# Allegro board OSCILLATOR2.brd
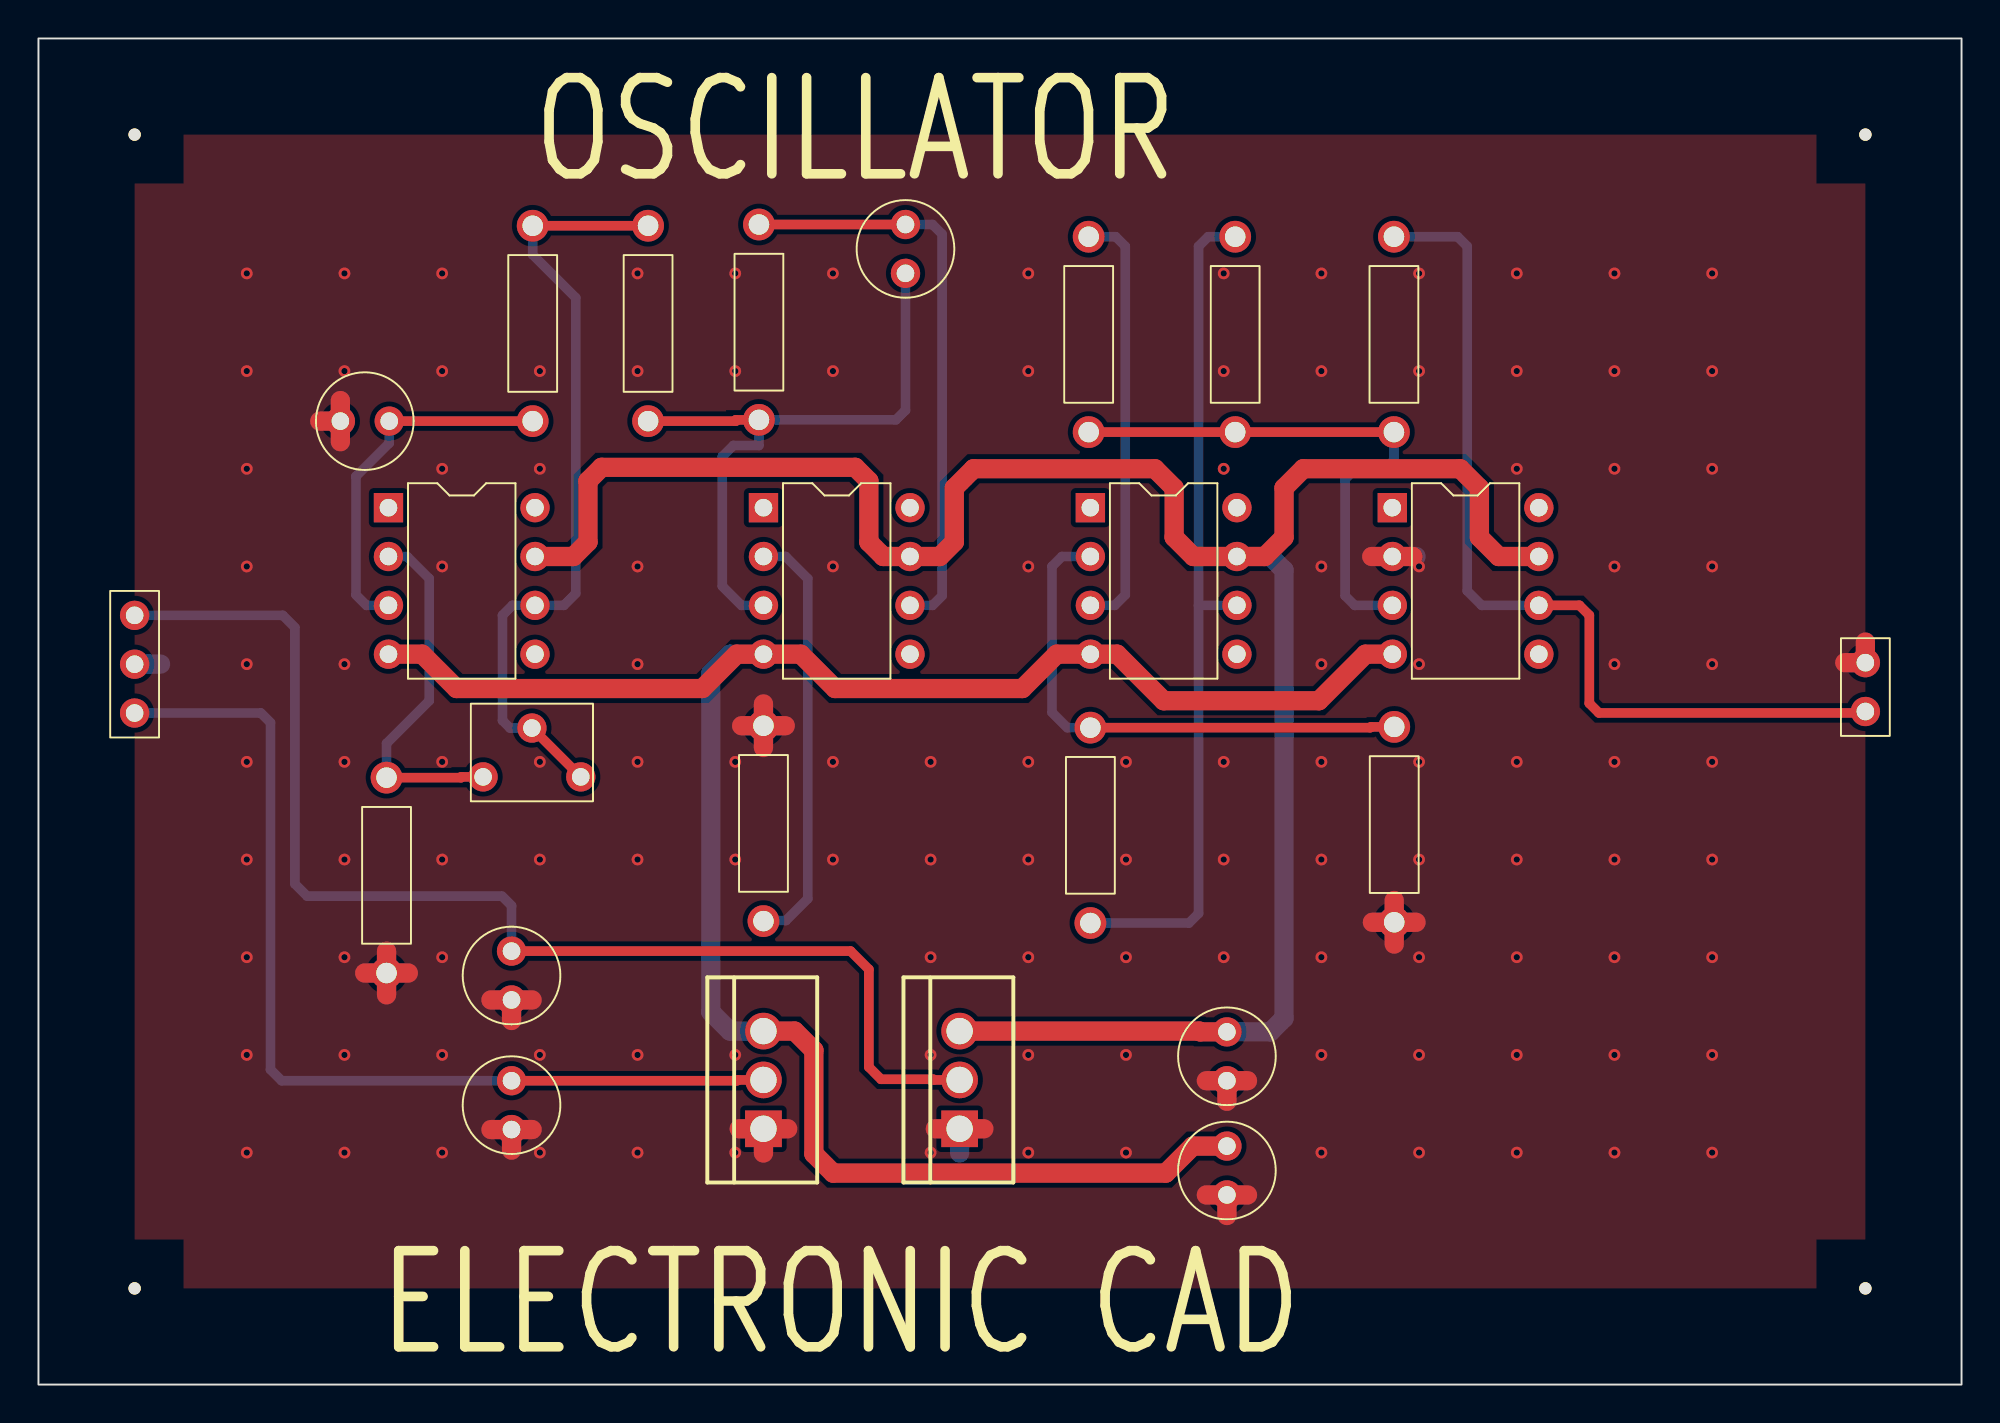
[diagram p0: board, top side]
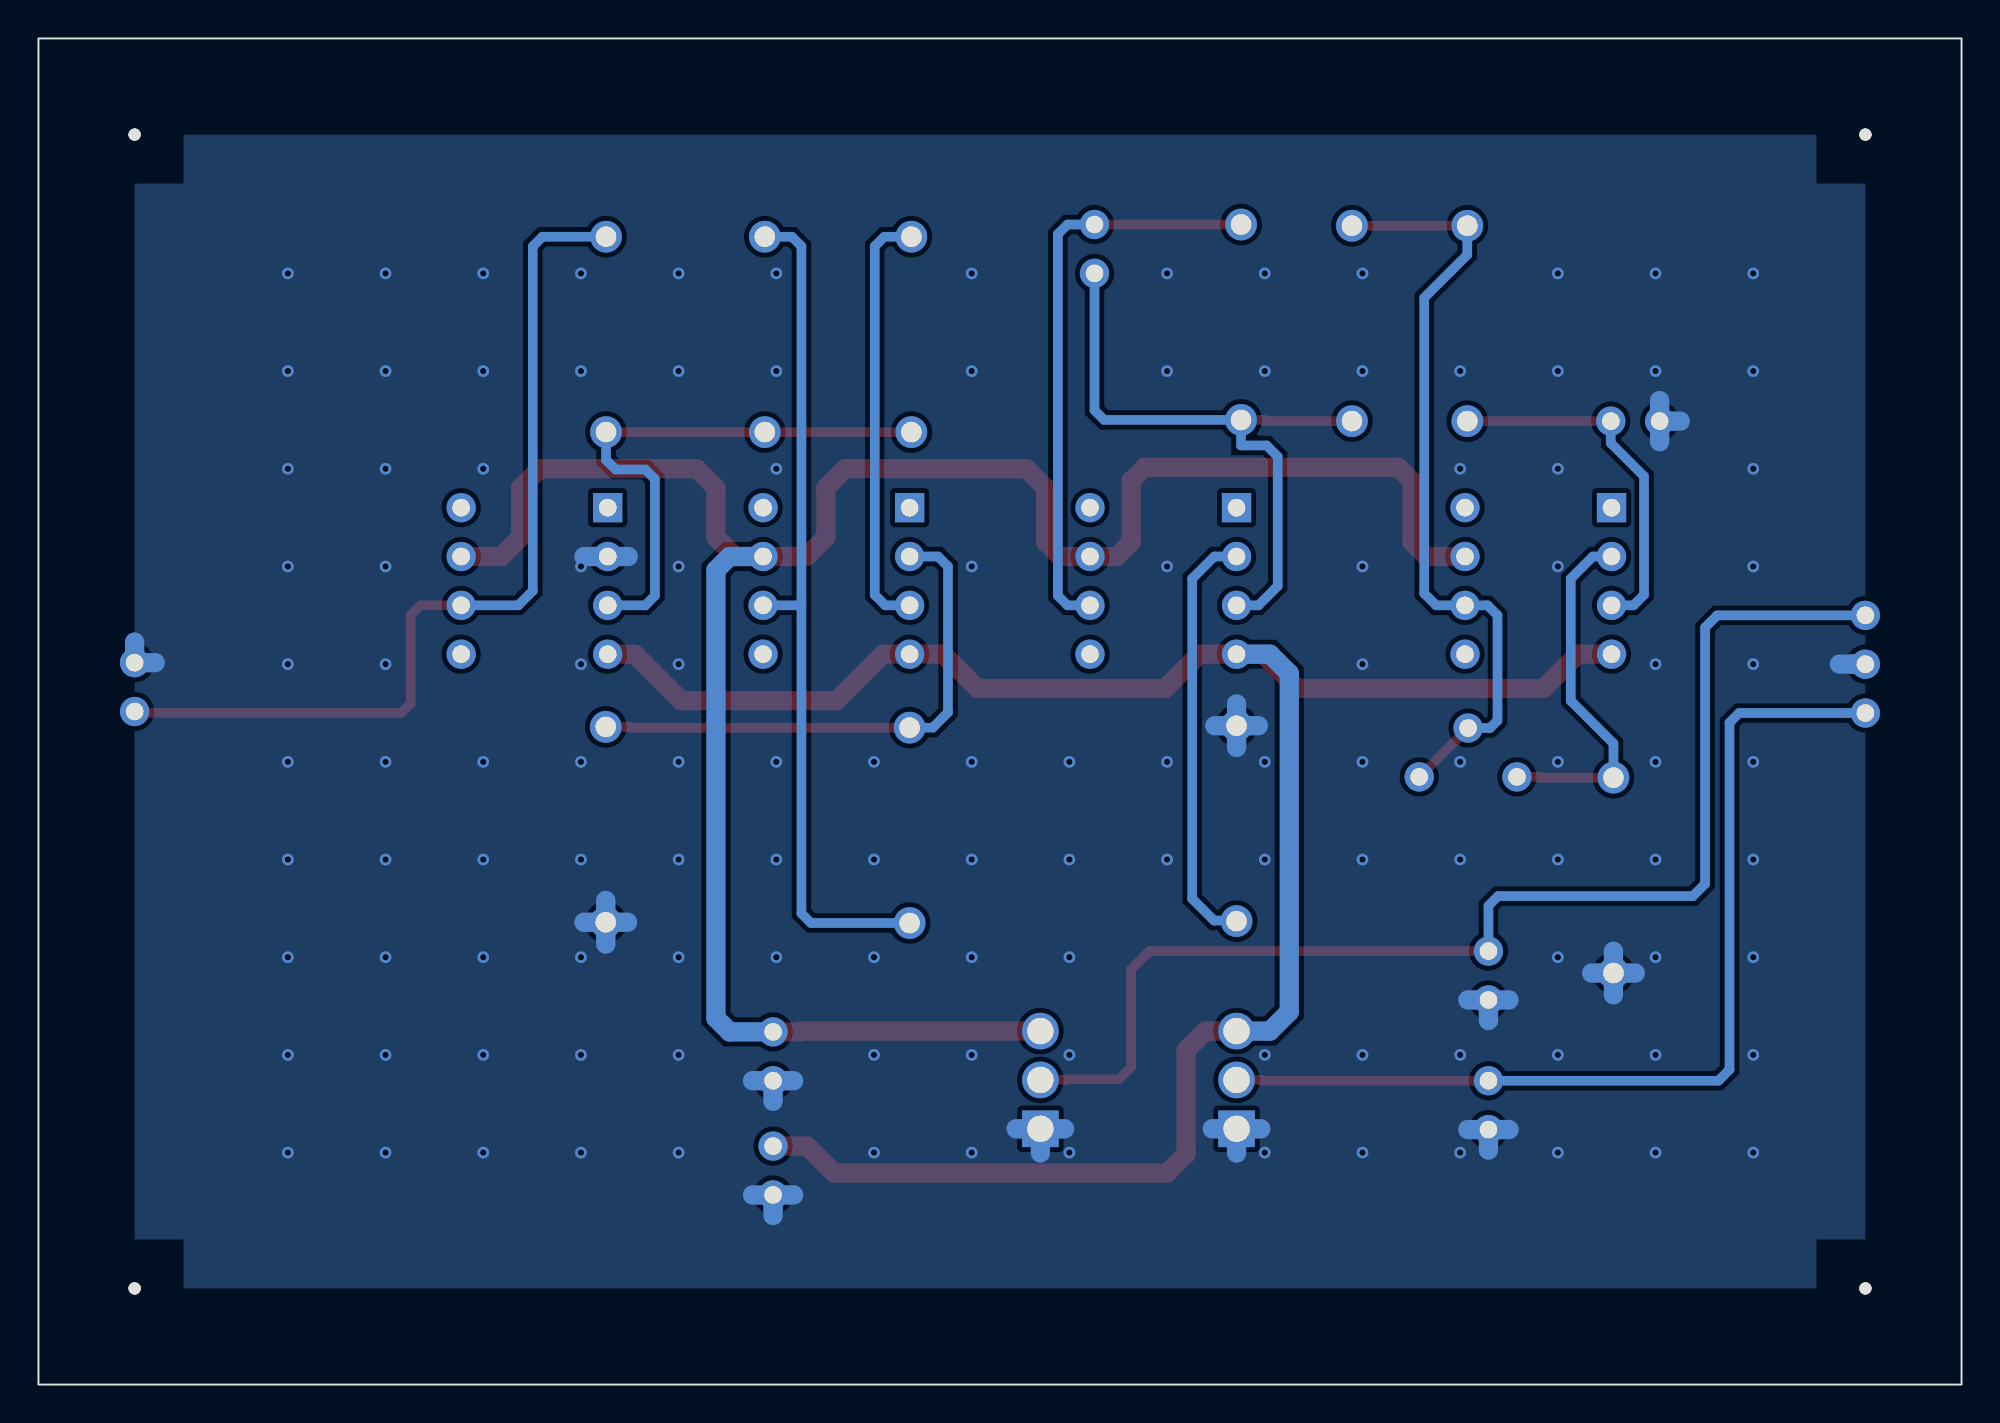
[diagram p1: board, bottom side, seen from below]

Outline 100 x 70 mm; copper layers: TOP, BOTTOM. Coordinates in mm from the lower left corner of the outline.
Outline path: rectangle 0,0 100,70

## Design rules (mm)
constraint set DEFAULT: min track width 0.5

## Placement (name value [footprint] x y rotation side)
C1  270pF  [CAP196]  15.7 50.1 270 top
C2  0.1uF  [CAP196]  24.6 20 0 top
C3  0.1uF  [CAP196]  24.6 15.8 180 top
C4  0.1uF  [CAP196]  61.8 15.8 0 top
C5  0.1uF  [CAP196]  61.8 12.4 180 top
C6  0.001uF  [CAP196]  45.09 60.33 180 top
J1  CON3  [JUMPER3]  5 40 270 top
J2  CON2  [JUMPER2]  95 35 90 top
NOREF  -  [unnamed]  95 5 0 top
NOREF#2  -  [unnamed]  95 65 0 top
NOREF#3  -  [#2]  0 70 0 top
NOREF#4  -  [#2]  100 0 90 top
NOREF#5  -  [unnamed]  5 5 0 top
NOREF#6  -  [unnamed]  5 65 0 top
R1  10K  [RES400]  25.7 50.1 0 top
R2  10K  [RES400]  18.1 21.4 0 top
R3  62K  [RES400]  31.7 50.1 0 top
R4  100K  [RES400]  37.47 60.33 180 top
R5  10K  [RES400]  37.7 24.1 0 top
R7  10K  [RES400]  54.61 49.53 0 top
R8  10K  [RES400]  62.23 49.53 0 top
R9  10K  [RES400]  70.48 59.69 180 top
R10  10K  [RES400]  54.7 24 0 top
R11  10K  [RES400]  70.5 34.2 180 top
U1  LF351  [DIP8_3]  18.2 45.6 0 top
U2  LF351  [DIP8_3]  37.7 45.6 0 top
U3  LF351  [DIP8_3]  54.7 45.6 0 top
U4  LF351  [DIP8_3]  70.4 45.6 0 top
U5  LM7812C  [TO220AB]  47.9 13.3 90 top
U6  LM7812C  [TO220AB]  37.7 13.3 90 top
VR1  1M  [RESADJ]  28.2 31.6 270 top

## Library data of the parts
C1-C6 = C: Tolerance: ***; User Part Number: ***
J1 = CON3: User Part Number: ***
J2 = CON2: User Part Number: ***
R1-R5 R7-R11 = R: Tolerance: ***; User Part Number: ***
U1-U4 = LF351_0: Tolerance: ***; User Part Number: ***
U5 U6 = LM7812C_1
VR1 = POT: Tolerance: ***; User Part Number: ***

## Footprints (pads in the part's own frame, mm; a bottom-side part is the same pattern mirrored in y, then rotated)
CAP196
  round 1.524 hole 0.914: 1(0,0) 2(0,2.54)
DIP8_3
  rect 1.524x1.524 hole 0.914: 1(0,0)
  round 1.524 hole 0.914: 2(0,-2.54) 3(0,-5.08) 4(0,-7.62) 5(7.62,-7.62) 6(7.62,-5.08) 7(7.62,-2.54) 8(7.62,0)
JUMPER2
  round 1.524 hole 0.914: 1(0,0) 2(2.54,0)
JUMPER3
  round 1.524 hole 0.914: 1(0,0) 2(2.54,0) 3(5.08,0)
RES400
  round 1.651 hole 1.067: 1(0,0) 2(0,10.16)
RESADJ
  round 1.524 hole 0.914: 1(0,0) 2(-2.54,-2.54) 3(0,-5.08)
TO220AB
  rect 1.905x1.905 hole 1.372: 1(0,0)
  round 1.905 hole 1.372: 2(2.54,0) 3(5.08,0)
unnamed
  round 0.635 hole 3.175 unplated: (0,0)

## Nets
+12V: C4.2 U1.7 U2.7 U3.7 U4.7 U5.3(VOUT)
-12V: C5.1 U1.4(V-) U2.4(V-) U3.4(V-) U4.4(V-) U6.3(VOUT)
GND: C1.1 C2.1 C3.2 C4.1 C5.2 J1.2 J2.2 R2.1 R5.2 R11.2 U4.2 U5.1 U6.1
OUT: J2.1 R9.1 U4.6
PORTLEFT-L: R7.2 U3.3
PORTLEFT-R: C6.1 R4.1 U2.6
N00936: C2.2 J1.1 U5.2
N00962: C3.1 J1.3 U6.2
N01051: R2.2 U1.2 VR1.3
N01073: C1.2 R1.1 U1.3
N01123: R1.2 R3.2 U1.6 VR1.1 VR1.2(WIPER)
N01233: C6.2 R3.1 R4.2 U2.3
N01251: R5.1 U2.2
N01869: R10.2 R11.1 U3.2
N01918: R8.2 R10.1 U3.6
N01953: R7.1 R8.1 R9.2 U4.3

Pads without a net: U1 1 5 8; U2 1 5 8; U3 1 5 8; U4 1 5 8

## Via types
v1: diameter 0.61, hole 0.33, TOP to BOTTOM, 122 vias

## Routing (per net, layer and track width the routed paths; a pad name or vN(x,y) marks a point on that pad's centre or on a via; arc(x,y) is an arc through that point)
+12V: length 116.7
  TOP w1: U4.7 75.93,43.06 74.93,44.06 74.93,46.62 73.93,47.62 65.77,47.62 64.77,46.62 64.77,44.06 63.77,43.06 U3.7 60.05,43.06 59.05,44.06 59.05,46.62 58.05,47.62 48.62,47.62 47.62,46.62 47.62,43.81 46.87,43.06 U2.7 43.93,43.06 43.18,43.81 43.18,46.99 42.47,47.7 29.28,47.7 28.57,46.99 28.57,43.81 27.82,43.06 U1.7 ; C4.2 60.41,18.34 60.37,18.38 U5.3
  BOTTOM w1: C4.2 64.06,18.34 64.77,19.05 64.77,42.35 64.06,43.06 U3.7
-12V: length 112
  TOP w1: U1.4 19.95,37.98 21.74,36.2 34.52,36.2 36.31,37.98 U2.4 39.64,37.98 41.42,36.2 51.16,36.2 52.95,37.98 U3.4 56.09,37.98 58.51,35.56 66.58,35.56 69,37.98 U4.4 ; C5.1 60.02,12.4 58.62,10.99 41.32,10.99 40.32,11.99 40.32,17.38 39.32,18.38 U6.3
  BOTTOM w1: U6.3 35.96,18.38 34.96,19.38 34.96,36.98 35.96,37.98 U2.4
GND: length 83.2
  TOP w1: 46.64,13.3 U5.1 49.16,13.3 ; C2.1 25.67,20 ; C2.1 23.53,20 ; C2.1 24.6,18.93 ; 36.57,34.26 R5.2 ; R5.2 37.7,35.39 ; R5.2 38.83,34.26 ; R5.2 37.7,33.13 ; 61.8,14.73 C4.1 ; C4.1 62.87,15.8 ; C4.1 60.73,15.8 ; C1.1 15.7,51.17 ; C1.1 14.63,50.1 ; C1.1 15.7,49.03 ; 69.33,43.06 U4.2 71.47,43.06 ; R11.2 71.63,24.04 ; R11.2 70.5,22.91 ; R11.2 69.37,24.04 ; R11.2 70.5,25.17 ; 36.44,13.3 U6.1 ; U6.1 37.7,12.04 ; U6.1 38.96,13.3 ; R2.1 19.23,21.4 ; R2.1 18.1,20.27 ; R2.1 16.97,21.4 ; R2.1 18.1,22.53 ; C3.2 25.67,13.26 ; C3.2 24.6,12.19 ; C3.2 23.53,13.26 ; 95,38.61 J2.2 93.93,37.54 ; 61.8,8.79 C5.2 ; C5.2 62.87,9.86 ; C5.2 60.73,9.86
  BOTTOM w1: 23.53,13.26 C3.2 ; C3.2 24.6,12.19 ; C3.2 25.67,13.26 ; C4.1 62.87,15.8 ; C4.1 60.73,15.8 ; C4.1 61.8,14.73 ; 95,38.61 J2.2 93.93,37.54 ; 37.7,12.04 U6.1 ; U6.1 38.96,13.3 ; U6.1 36.44,13.3 ; 15.7,49.03 C1.1 ; C1.1 15.7,51.17 ; C1.1 14.63,50.1 ; R11.2 71.63,24.04 ; R11.2 69.37,24.04 ; R11.2 70.5,25.17 ; R11.2 70.5,22.91 ; 36.57,34.26 R5.2 ; R5.2 38.83,34.26 ; R5.2 37.7,33.13 ; R5.2 37.7,35.39 ; 18.1,20.27 R2.1 ; R2.1 19.23,21.4 ; R2.1 16.97,21.4 ; R2.1 18.1,22.53 ; C5.2 62.87,9.86 ; C5.2 60.73,9.86 ; C5.2 61.8,8.79 ; 71.64,43.06 U4.2 69.33,43.06 ; 47.9,12.04 U5.1 ; U5.1 46.64,13.3 ; U5.1 49.16,13.3 ; 23.53,20 C2.1 ; C2.1 25.67,20 ; C2.1 24.6,18.93 ; 6.35,37.47 5.71,37.47 5.71,37.46 J1.2
  vias: v1(10.83,57.78) v1(10.83,52.7) v1(10.83,47.62) v1(10.83,42.54) v1(10.83,37.46) v1(10.83,32.38) v1(10.83,27.3) v1(10.83,22.22) v1(10.83,17.14) v1(10.83,12.06) v1(15.91,57.78) v1(15.91,52.7) v1(15.91,37.46) v1(15.91,32.38) v1(15.91,27.3) v1(15.91,22.22) v1(15.91,17.14) v1(15.91,12.06) v1(20.99,57.78) v1(20.99,52.7) v1(20.99,47.62) v1(20.99,42.54) v1(20.99,32.38) v1(20.99,27.3) v1(20.99,22.22) v1(20.99,17.14) v1(20.99,12.06) v1(26.07,52.7) v1(26.07,47.62) v1(26.07,32.38) v1(26.07,27.3) v1(26.07,17.14) v1(26.07,12.06) v1(31.15,57.78) v1(31.15,52.7) v1(31.15,42.54) v1(31.15,37.46) v1(31.15,32.38) v1(31.15,27.3) v1(31.15,17.14) v1(31.15,12.06) v1(36.23,57.78) v1(36.23,52.7) v1(36.23,32.38) v1(36.23,27.3) v1(36.23,17.14) v1(36.23,12.06) v1(41.31,57.78) v1(41.31,52.7) v1(41.31,42.54) v1(41.31,32.38) v1(41.31,27.3) v1(46.39,32.38) v1(46.39,27.3) v1(46.39,22.22) v1(46.39,17.14) v1(46.39,12.06) v1(51.47,57.78) v1(51.47,52.7) v1(51.47,42.54) v1(51.47,32.38) v1(51.47,27.3) v1(51.47,22.22) v1(51.47,17.14) v1(51.47,12.06) v1(56.55,32.38) v1(56.55,27.3) v1(56.55,22.22) v1(56.55,17.14) v1(56.55,12.06) v1(61.63,57.78) v1(61.63,52.7) v1(61.63,47.62) v1(61.63,32.38) v1(61.63,27.3) v1(61.63,22.22) v1(66.71,57.78) v1(66.71,52.7) v1(66.71,42.54) v1(66.71,37.46) v1(66.71,32.38) v1(66.71,27.3) v1(66.71,22.22) v1(66.71,17.14) v1(66.71,12.06) v1(71.79,57.78) v1(71.79,52.7) v1(71.79,42.54) v1(71.79,37.46) v1(71.79,32.38) v1(71.79,27.3) v1(71.79,22.22) v1(71.79,17.14) v1(71.79,12.06) v1(76.87,57.78) v1(76.87,52.7) v1(76.87,47.62) v1(76.87,32.38) v1(76.87,27.3) v1(76.87,22.22) v1(76.87,17.14) v1(76.87,12.06) v1(81.95,57.78) v1(81.95,52.7) v1(81.95,47.62) v1(81.95,42.54) v1(81.95,37.46) v1(81.95,32.38) v1(81.95,27.3) v1(81.95,22.22) v1(81.95,17.14) v1(81.95,12.06) v1(87.03,57.78) v1(87.03,52.7) v1(87.03,47.62) v1(87.03,42.54) v1(87.03,37.46) v1(87.03,32.38) v1(87.03,27.3) v1(87.03,22.22) v1(87.03,17.14) v1(87.03,12.06)
OUT: length 48
  TOP w0.5: J2.1 94.92,34.92 81.14,34.92 80.64,35.42 80.64,40.01 80.13,40.52 U4.6
  BOTTOM w0.5: R9.1 73.8,59.69 74.3,59.19 74.3,41.27 75.05,40.52 U4.6
PORTLEFT-L: length 22.3
  BOTTOM w0.5: U3.3 55.97,40.52 56.52,41.07 56.52,59.19 56.02,59.69 R7.2
PORTLEFT-R: length 30.4
  TOP w0.5: C6.1 R4.1
  BOTTOM w0.5: U2.6 46.49,40.52 46.99,41.02 46.99,59.83 46.49,60.33 C6.1
N00936: length 65.1
  TOP w0.5: U5.2 46.57,15.84 46.53,15.88 43.81,15.88 43.18,16.51 43.18,21.59 42.23,22.54 C2.2
  BOTTOM w0.5: J1.1 12.71,40 13.34,39.37 13.34,26.04 13.97,25.4 24.1,25.4 24.6,24.9 C2.2
N00962: length 51.2
  TOP w0.5: C3.1 36.33,15.8 36.37,15.84 U6.2
  BOTTOM w0.5: J1.3 11.56,34.92 12.06,34.42 12.06,16.38 12.64,15.8 C3.1
N01051: length 18.9
  TOP w0.5: R2.2 21.98,31.56 21.98,31.6 VR1.3
  BOTTOM w0.5: U1.2 19.17,43.06 20.32,41.91 20.32,35.56 18.1,33.34 R2.2
N01073: length 19.1
  TOP w0.5: C1.2 R1.1
  BOTTOM w0.5: U1.3 17.06,40.52 16.51,41.07 16.51,47.23 18.24,48.96 C1.2
N01123: length 41.1
  TOP w0.5: VR1.1 VR1.2 ; R1.2 R3.2
  BOTTOM w0.5: R1.2 25.7,58.76 27.94,56.52 27.94,41.14 27.32,40.52 U1.6 24.64,40.52 24.13,40.01 24.13,34.53 24.52,34.14 VR1.2
N01233: length 33.5
  TOP w0.5: R3.1 36.26,50.1 36.26,50.16 37.47,50.16
  BOTTOM w0.5: U2.3 36.56,40.52 35.56,41.52 35.56,48.26 36.14,48.84 37.47,48.84 37.47,50.16 44.59,50.16 45.09,50.66 45.09,57.78
N01251: length 22.2
  BOTTOM w0.5: U2.2 38.85,43.06 40.01,41.91 40.01,25.27 38.87,24.13 37.73,24.13 R5.1
N01869: length 27.9
  TOP w0.5: R10.2 69.26,34.16 69.3,34.2 R11.1
  BOTTOM w0.5: R10.2 53.5,34.16 52.7,34.95 52.7,42.55 53.22,43.06 U3.2
N01918: length 44.6
  BOTTOM w0.5: R8.2 60.83,59.69 60.33,59.19 60.33,40.52 ; R10.1 59.83,24 60.33,24.5 60.33,40.52 ; 60.33,40.52 U3.6
N01953: length 29
  TOP w0.5: R7.1 R8.1 R9.2
  BOTTOM w0.5: R9.2 70.48,48.09 69.98,47.59 68.44,47.59 67.94,47.09 67.94,41.02 68.44,40.52 U4.3

## Copper pours and planes (outline as drawn; the poured copper is in the pictures)
GND on TOP: 5,5 5,65 95,65 95,5 ; 1 cut-out
GND on BOTTOM: 5,5 5,65 95,65 95,5

## Text on the board
Ref Des/Silkscreen Top: ELECTRONIC CAD | OSCILLATOR
COMPVAL_TYPE_TOP: FIGURE | FINISHED_SIZE | 0.33 | 0.914 | 1.067 | 1.372 | 3.175 | DRILL CHART: TOP to BOTTOM | ALL UNITS ARE IN MILLIMETERS | PLATED | NON-PLATED | QTY | 122 | 52 | 20 | 6 | 4
